# Altium PCB USB-PS2.PcbDoc
Units mil, origin at the board's own origin, x right, y up, seen from the top; angles counter-clockwise.
Board outline not stored, 2 copper layers (Top, Bottom), stack 0 mil thick; 24 components, 20 nets, 121 pads, 17 vias.
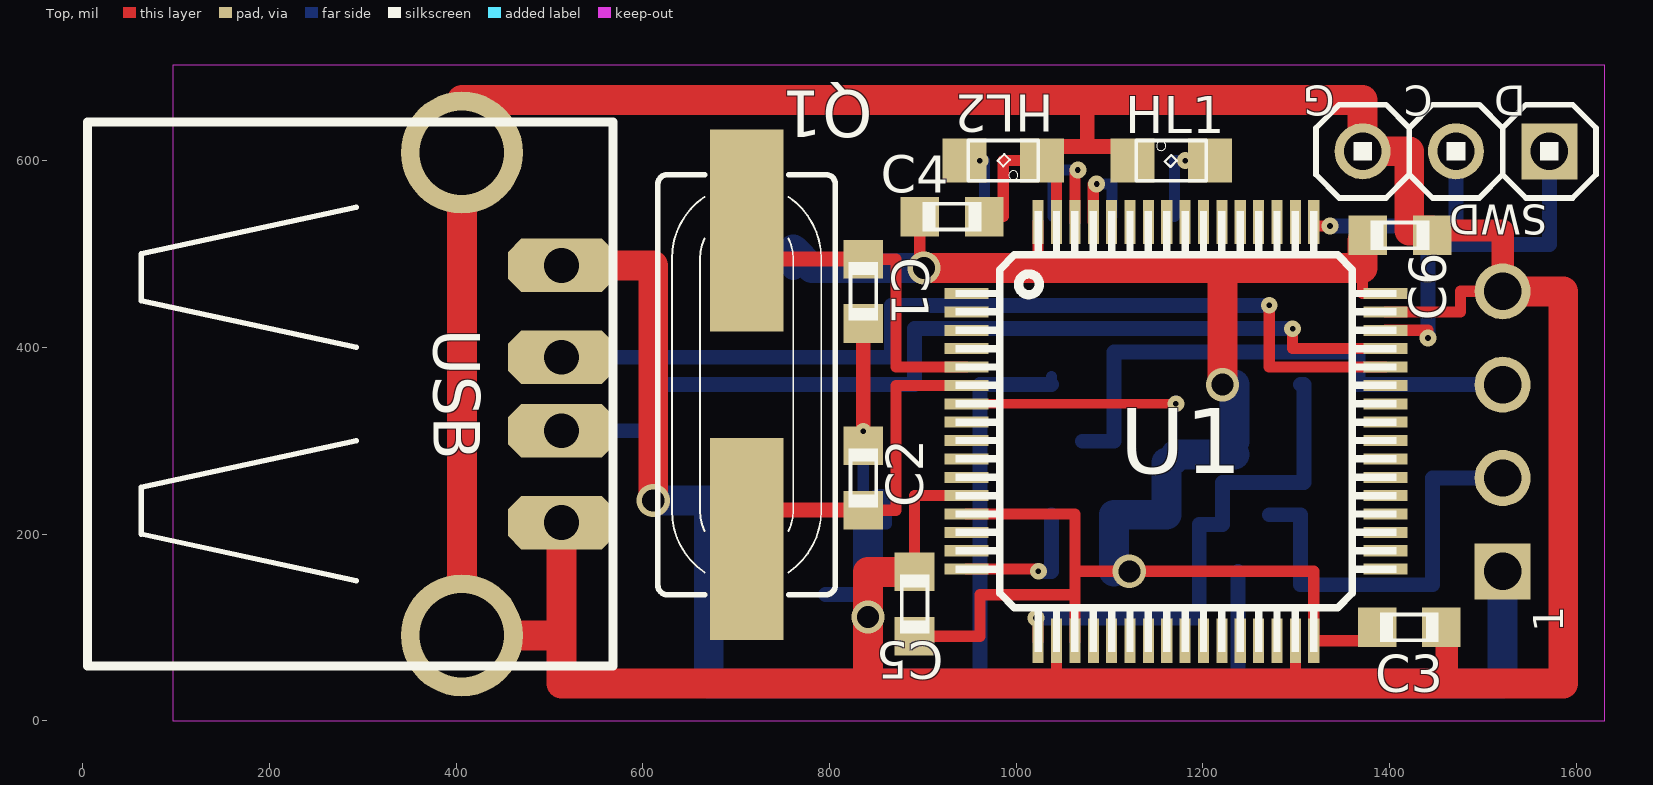
[diagram p0: Top view]
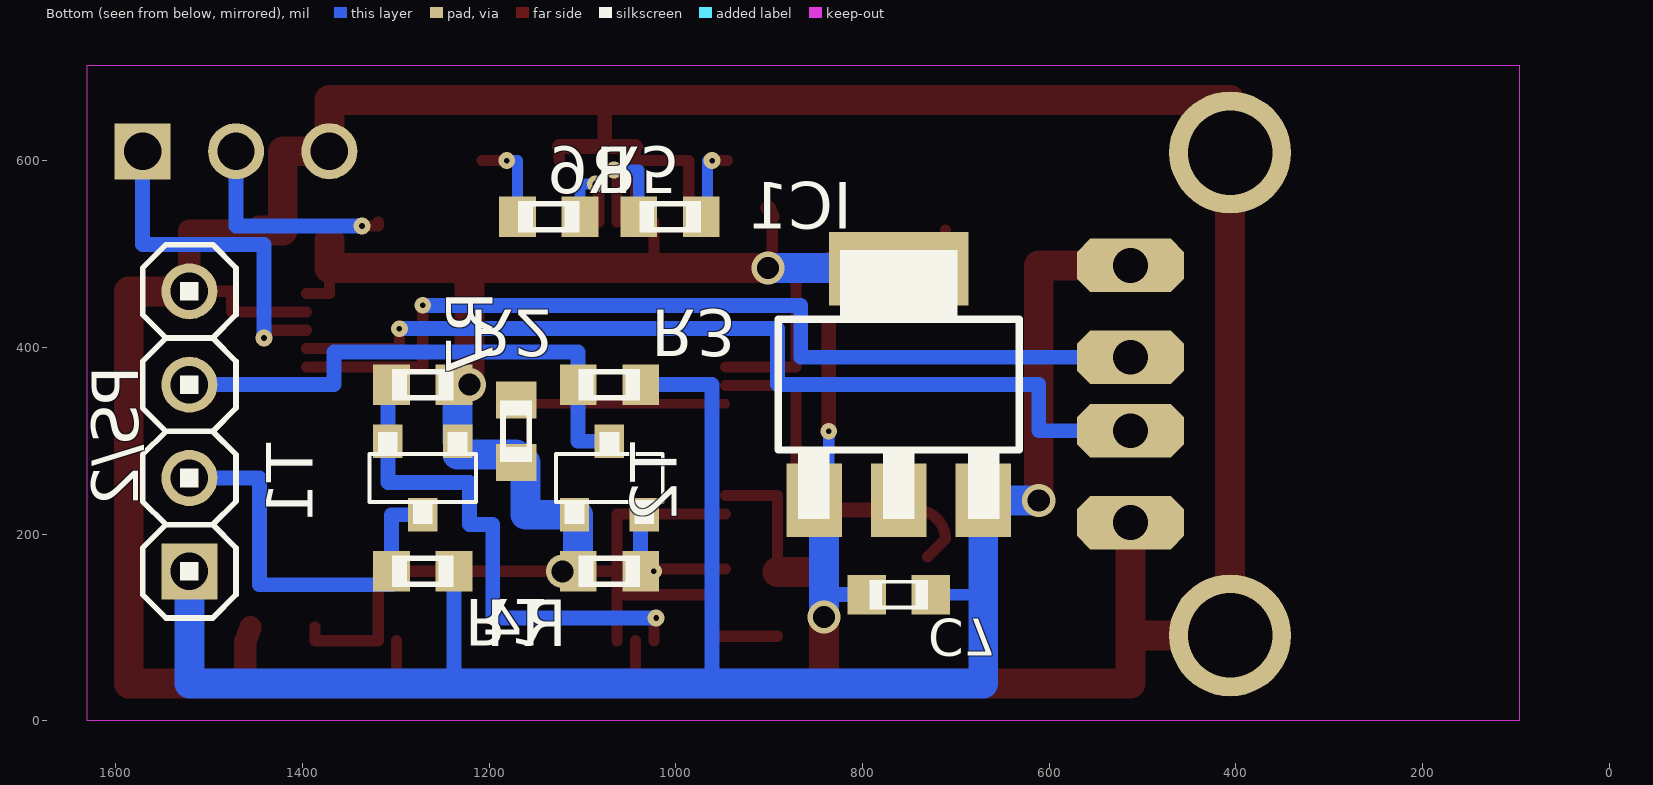
[diagram p1: Bottom view, seen from below]

## Layer stack, top to bottom

## Components (designator, comment, footprint, x,y, rotation, side; value= is the part's Value field where it differs from the comment)
C1 "" C0603K#1 836.18,460 r270 top
C2 "" C0603K#1 836.18,260 r90 top
C3 "" C0603K#1 1421.18,100 r0 top
C4 "" C0603K#1 931.18,540 r0 top
C5 "" C0603K#1 891.18,125 r90 top
C6 "" C0603K#1 1411.18,520 r0 top
C7 "" C0603K#2 761.18,135 r180 bottom
HL1 "" SML0805 1166.18,600 r0 top
HL2 "" SML0805 986.18,600 r180 top
IC1 "" SOT223 761.18,360 r0 bottom
PS/2 "" 1X04 1521.18,310 r90 bottom
Q1 "" HC49-4-HSMX 711.18,360 r90 top
R1 "" R0603#1 1271.18,160 r180 bottom
R2 "" R0603#1 1271.18,360 r180 bottom
R3 "" R0603#1 1071.18,360 r180 bottom
R4 "" R0603#1 1071.18,160 r0 bottom
R5 "" R0603#1 1136.18,540 r180 bottom
R6 "" R0603#1 1006.18,540 r0 bottom
R7 "" R0603#2 1171.18,310 r270 bottom
SWD "" 1X03 1471.18,610 r180 top
T1 "" MICRO3 1271.18,260 r180 bottom
T2 "" MICRO3 1071.18,260 r0 bottom
U1 "" TQFP64 1171.18,310 r0 top
USB "" PN87520-S 406.18,350 r270 top

## Footprints (in the part's own frame and the unit in brackets; to place one, negate y for a bottom-side part, rotate by r counter-clockwise, add the part's x,y. Pads: shape width x height; smd on the part's side, far side on the other; paste and mask are expansions set on the pad)
1X03 [mil]
  rect 60x60 hole 40: 1(-100,0)
  round 60 hole 40: 2(0,0) 3(100,0)
  silkscreen extent -150,-50 150,50
1X04 [mil]
  rect 60x60 hole 40: 1(-150,0)
  round 60 hole 40: 2(-50,0) 3(50,0) 4(150,0)
  silkscreen extent -200,-50 200,50
C0603K#1 [mm]
  rect 1.05x1.08 smd: 1(-0.875,0) 2(0.875,0)
  silkscreen extent -0.8,-0.4 0.8,0.4
C0603K#2 [mm]
  rect 1.05x1.08 smd: 1(0.875,0) 2(-0.875,0)
  silkscreen extent -0.8,-0.4 0.8,0.4
HC49-4-HSMX [mm]
  rect 5.5x2 smd: 1(-4.2,0) 2(4.2,0)
  silkscreen extent -5.71,-2.41 5.71,2.41
MICRO3 [mm]
  rect 0.8x0.9 smd: 1(0.95,1) 2(-0.95,1) 3(0,-1)
  silkscreen extent -1.45,-1.25 1.45,1.25
PN87520-S [mm]
  oct 1.458x2.916 hole 0.95: 1(-3.5,2.71) 2(-1,2.71) 3(1,2.71) 4(3.5,2.71)
  round 3.316 hole 2.3: S1(-6.57,0) S2(6.57,0)
  silkscreen extent -7.4,-10.19 7.4,4.11
R0603#1 [mm]
  rect 1x1.1 smd: 1(0.85,0) 2(-0.85,0)
  silkscreen extent -0.84,-0.43 0.84,0.43
R0603#2 [mm]
  rect 1x1.1 smd: 1(-0.85,0) 2(0.85,0)
  silkscreen extent -0.84,-0.43 0.84,0.43
SML0805 [mm]
  rect 1.2x1.2 smd: A(1.05,0) C(-1.05,0)
  silkscreen extent -0.95,-0.55 0.95,0.55
SOT223 [mm]
  rect 1.5x2 smd: 1(2.3,3.15) 2(0,3.15) 3(-2.3,3.15)
  rect 3.8x2 smd: 4(0,-3.15)
  silkscreen extent -3.28,-3.66 3.28,3.66
TQFP64 [mm]
  rect 1.2x0.3 smd: 1(-5.7,3.75) 2(-5.7,3.25) 3(-5.7,2.75) 4(-5.7,2.25) 5(-5.7,1.75) 6(-5.7,1.25) 7(-5.7,0.75) 8(-5.7,0.25) 9(-5.7,-0.25) 10(-5.7,-0.75) 11(-5.7,-1.25) 12(-5.7,-1.75) 13(-5.7,-2.25) 14(-5.7,-2.75) 15(-5.7,-3.25) 16(-5.7,-3.75) 33(5.7,-3.75) 34(5.7,-3.25) 35(5.7,-2.75) 36(5.7,-2.25) 37(5.7,-1.75) 38(5.7,-1.25) 39(5.7,-0.75) 40(5.7,-0.25) 41(5.7,0.25) 42(5.7,0.75) 43(5.7,1.25) 44(5.7,1.75) 45(5.7,2.25) 46(5.7,2.75) 47(5.7,3.25) 48(5.7,3.75)
  rect 0.3x1.2 smd: 17(-3.75,-5.7) 18(-3.25,-5.7) 19(-2.75,-5.7) 20(-2.25,-5.7) 21(-1.75,-5.7) 22(-1.25,-5.7) 23(-0.75,-5.7) 24(-0.25,-5.7) 25(0.25,-5.7) 26(0.75,-5.7) 27(1.25,-5.7) 28(1.75,-5.7) 29(2.25,-5.7) 30(2.75,-5.7) 31(3.25,-5.7) 32(3.75,-5.7) 49(3.75,5.7) 50(3.25,5.7) 51(2.75,5.7) 52(2.25,5.7) 53(1.75,5.7) 54(1.25,5.7) 55(0.75,5.7) 56(0.25,5.7) 57(-0.25,5.7) 58(-0.75,5.7) 59(-1.25,5.7) 60(-1.75,5.7) 61(-2.25,5.7) 62(-2.75,5.7) 63(-3.25,5.7) 64(-3.75,5.7)
  silkscreen extent -6,-6 6,6

## Via types
v1: diameter 18, hole 6, Top to Bottom, 12 vias
v2: diameter 35.62, hole 23.62, Top to Bottom, 5 vias

## Nets (pads, with @x,y where several pads share a name; then routed paths per layer and width w, separated by ;. In a path a pad name is that pad's centre, name@x,y a point inside that pad or via, vN(x,y) a via of type N, cw(c..) or ccw(c..) an arc to the next point about the centre after c; other vN are vias at no path point)
+3V3: C3.1 C4.1 C5.1 C6.1 IC1.4 R2.1 R4.1 R7.2 T1.1 T2.1 U1.13 U1.19 U1.32 U1.48 U1.64 | length 2214
  Top w12: C5.1 961.18,90.55 961.18,135 1062.91,135 ; C4.1 896.73,485 v2(901.18,485) ; U1.13 1062.91,221.42 1062.91,160 ; 1021.18,485 1023.54,485 U1.64 ; U1.19 1062.91,135 ; 1371.18,485 1371.18,457.64 U1.48 ; C6.1@1371.18,514.45 C6.1 ; C3.1 1386.73,85.59 U1.32 1318.82,160 v2(1121.18,160) 1062.91,160 ; 1062.91,135 1062.91,160
  Top w16: C4.1 C4.1@901.18,550
  Top w32: v2(901.18,485) 1021.18,485 1221.18,485 ; v2(1221.18,360) 1221.18,485 ; C6.1@1371.18,514.45 1371.18,485 1221.18,485
  Bottom w12: R4.1 v2(1121.18,160)
  Bottom w16: T2.1@1104.65,220.63 T2.1 ; v2(1221.18,360) R2.1 R2.1@1233.78,360 ; T1.1@1233.78,285 T1.1
  Bottom w24: IC1.4 IC1.4@761.18,505 ; R7.2@1161.18,276.54 R7.2
  Bottom w32: IC1.4@761.18,505 781.18,485 v2(901.18,485) ; R4.1 T2.1@1104.65,220.63 ; T2.1 1161.18,220.63 R7.2@1161.18,276.54 ; R7.2@1171.18,285 T1.1@1233.78,285 ; T1.1 R2.1@1233.78,360
+5V: C7.1 IC1.3 PS/2.1 R1.1 R3.1 USB.1 | length 2157.2
  Top w32: USB.1 611.18,487.8 v2(611.18,235.98)
  Bottom w12: 670.63,135 C7.1 ; R3.1 R3.1@1037.72,368.46
  Bottom w16: 961.18,40 961.18,360 R3.1 ; 1237.72,40 R1.1
  Bottom w32: v2(611.18,235.98) IC1.3 670.63,135 670.63,40 961.18,40 1237.72,40 1521.18,40 PS/2.1
GND: C1.2 C2.2 C3.2 C4.2 C5.2 C6.2 C7.2 HL1.C HL2.C IC1.1 PS/2.4 SWD.3 U1.12 U1.18 U1.31 U1.47 U1.63 USB.4 USB.S1 USB.S2 | length 5201.3
  Top w12: C2.2 v1(836.18,310) ; C5.2 891.18,241.1 U1.12 ; C4.2 986.18,540 986.18,600 HL2.C HL2.C@1043.23,600 ; U1.18 1043.23,40 1061.18,40 ; U1.63 HL2.C@1043.23,600 ; HL2.C@1043.23,615 HL2.C@1043.23,600 ; HL1.C HL1.C@1124.84,615 ; U1.31 1299.13,40 1311.18,40 ; 1366.18,665 1371.18,665 ; U1.47 1476.18,437.95 1476.18,460 PS/2.4 ; C6.2@1436.18,525.55 C6.2
  Top w16: v1(836.18,310) C1.2 ; HL2.C@1043.23,615 1076.18,615 ; 1076.18,665 1076.18,615 ; HL1.C@1124.84,615 1076.18,615
  Top w24: v2@841.18,110 v2(841.18,111.1) ; C6.2@1436.18,525.55 1521.18,525 PS/2.4 ; C3.2 1461.18,85 1461.18,40
  Top w32: USB.S2 512.87,91.34 ; USB.S2@406.18,95 USB.S1 406.18,665 1076.18,665 1366.18,665 ; USB.4 512.87,91.34 ; C5.2 841.18,159.45 841.18,110 841.18,40 ; 1371.18,665 SWD.3 1421.18,610 1421.18,525 1445.63,525 C6.2 ; PS/2.4 1586.18,460 1586.18,40 1461.18,40 1311.18,40 1061.18,40 841.18,40 ; 512.87,91.34 512.87,40 841.18,40
  Bottom w12: v1(836.18,310) 836.18,235.98 IC1.1 IC1.1@861.18,210.98 ; IC1.1@841.18,210 IC1.1@861.18,210.98 ; IC1.1@861.18,235.98 IC1.1@861.18,210.98
  Bottom w16: C7.2 841.18,135
  Bottom w24: IC1.1 IC1.1@861.18,235.98
  Bottom w32: v2(841.18,111.1) 841.18,135 IC1.1@841.18,210
N$1: U1.44 USB.2 | length 1004.4
  Top w12: v1(1271.18,445) 1271.18,378.9 U1.44
  Bottom w16: USB.2 866.18,389.37 866.18,445 v1(1271.18,445)
N$2: U1.45 USB.3 | length 1013.5
  Top w12: v1(1296.18,420) 1296.18,398.58 U1.45
  Bottom w16: USB.3 611.18,310.63 611.18,360 891.18,360 891.18,420 v1(1296.18,420)
N$3: R5.1 U1.61 | length 95.7
  Top w12: U1.61 1082.6,575 v1(1086.18,575)
  Bottom w12: v1(1086.18,575) 1102.72,575 R5.1
N$4: C1.1 Q1.2 U1.5 | length 459.1
  Top w12: Q1.2@711.18,435 Q1.2 ccw(c742.09,525.35) Q1.2@742.09,494.45 ; C1.1 871.18,494.45 871.18,378.9 U1.5
  Top w16: Q1.2@742.09,494.45 C1.1
N$5: HL1.A R5.2 | length 97.9
  Top w12: v1(1181.18,600) HL1.A
  Bottom w12: R5.2 1169.65,600 v1(1181.18,600)
N$6: HL2.A R6.2 | length 87.9
  Top w12: HL2.A v1(961.18,600)
  Bottom w12: v1(961.18,600) 966.18,600 966.18,540 R6.2
N$7: R6.1 U1.62 | length 135.4
  Top w12: U1.62 1062.91,590 v1(1066.18,590)
  Bottom w12: R6.1 1039.65,590 v1(1066.18,590)
N$8: C2.1 Q1.1 U1.6 | length 413.9
  Top w12: Q1.1@730.28,175.55 Q1.1 cw(c742.09,194.65) Q1.1@742.09,225.55 ; C2.1 871.18,225.55 871.18,359.21 U1.6
  Top w16: Q1.1@742.09,225.55 C2.1
N$9: R7.1 U1.7 | length 228.3
  Top w10: U1.7 v1(1171.18,339.53)
  Bottom w10: v1(1171.18,339.53) R7.1
N$10: 
N$16: R2.2 T1.2 U1.17 | length 568.1
  Top w12: v1(1021.18,110) 1023.54,110 U1.17
  Bottom w16: v1(1021.18,110) 1196.18,110 1196.18,210 1221.18,210 1221.18,255 1308.58,255 T1.2 1308.58,360 R2.2
N$17: R4.2 T2.2 U1.16 | length 157.9
  Top w12: U1.16 1023.78,162.36 v1(1023.78,160)
  Bottom w12: T2.2 T2.2@1037.72,220.63
  Bottom w16: v1(1023.78,160) R4.2 T2.2@1037.72,220.63
PS2_CLK: PS/2.2 R1.2 T1.3 | length 439.4
  Bottom w16: T1.3 1304.65,220.63 R1.2 1304.65,145.63 1446.18,145.63 1446.18,260 PS/2.2
PS2_DAT: PS/2.3 R3.2 T2.3 | length 580.6
  Bottom w16: T2.3 1104.65,299.37 R3.2 1104.65,395 1366.18,395 1366.18,360 PS/2.3
SWCLK: SWD.2 U1.49 | length 236.8
  Top w12: U1.49 1318.82,530 v1(1336.18,530)
  Bottom w16: v1(1336.18,530) 1471.18,530 SWD.2
SWDIO: SWD.1 U1.46 | length 383.9
  Top w12: U1.46 1441.18,418.27 v1(1441.18,410)
  Bottom w16: v1(1441.18,410) 1441.18,510 1571.18,510 SWD.1
VBAT: U1.1
pads on no net: IC1.2 U1.2 U1.3 U1.4 U1.8 U1.9 U1.10 U1.11 U1.14 U1.15 U1.20 U1.21 U1.22 U1.23 U1.24 U1.25 U1.26 U1.27 U1.28 U1.29 U1.30 U1.33 U1.34 U1.35 U1.36 U1.37 U1.38 U1.39 U1.40 U1.41 U1.42 U1.43 U1.50 U1.51 U1.52 U1.53 U1.54 U1.55 U1.56 U1.57 U1.58 U1.59 U1.60

## Keep-outs
Keep-Out:
  lines w0.31: 96.18,0 1630.39,0 1630.39,702.01 96.18,702.01 96.18,0

## Silkscreen, mask and mechanical layers (free items; w line width, h text height)
Layer0:
  lines w0.31 net +3V3: 1171.18,276.54 1171.18,285
Top Overlay:
  text "G" at 1341.18,680 h32 r180
  text "C" at 1446.18,680 h32 r180
  text "D" at 1546.18,680 h32 r180
  text "1" at 1586.18,95 h32 r90

## Text inside footprints (layer, text, board x,y; h text height)
IC1: Mech2 "direction of pcb" at 745.43,375.75 h10; Mech2 "transportation for" at 745.43,358.03 h10; Mech2 "wavesoldering" at 745.43,340.31 h10